# Altium PCB CAMtastic1_5.PcbDoc
Units mm, origin at the board's own origin, x right, y up, seen from the top; angles counter-clockwise.
Board outline 43 x 40.1 mm, 4 copper layers (Top Layer, Mid-Layer 1, Mid-Layer 2, Bottom Layer), stack 1.504 mm thick; 68 components, 89 nets, 359 pads, 109 vias.
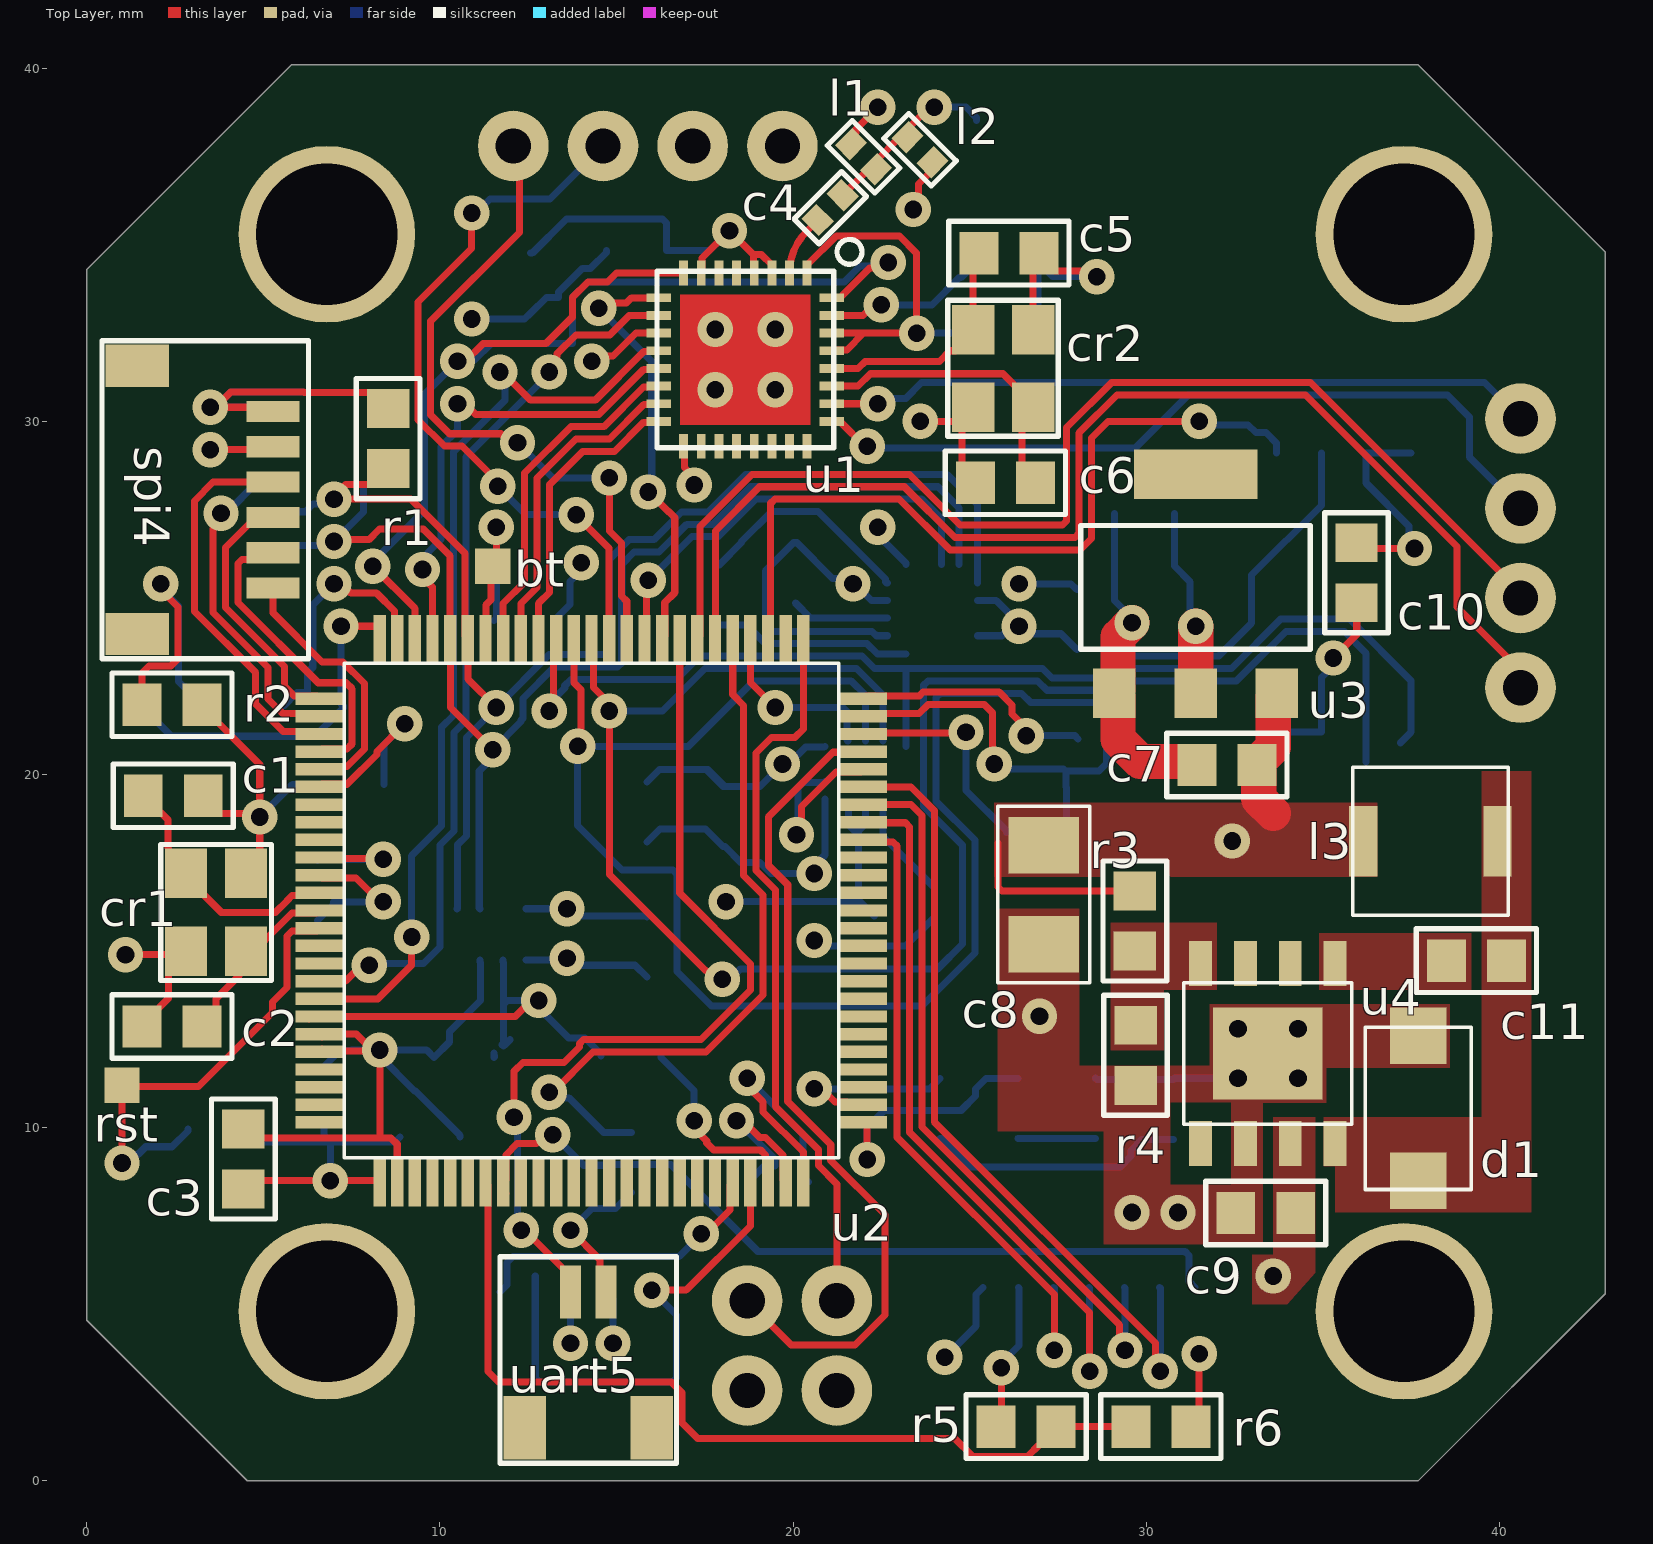
[diagram p0: Top Layer view]
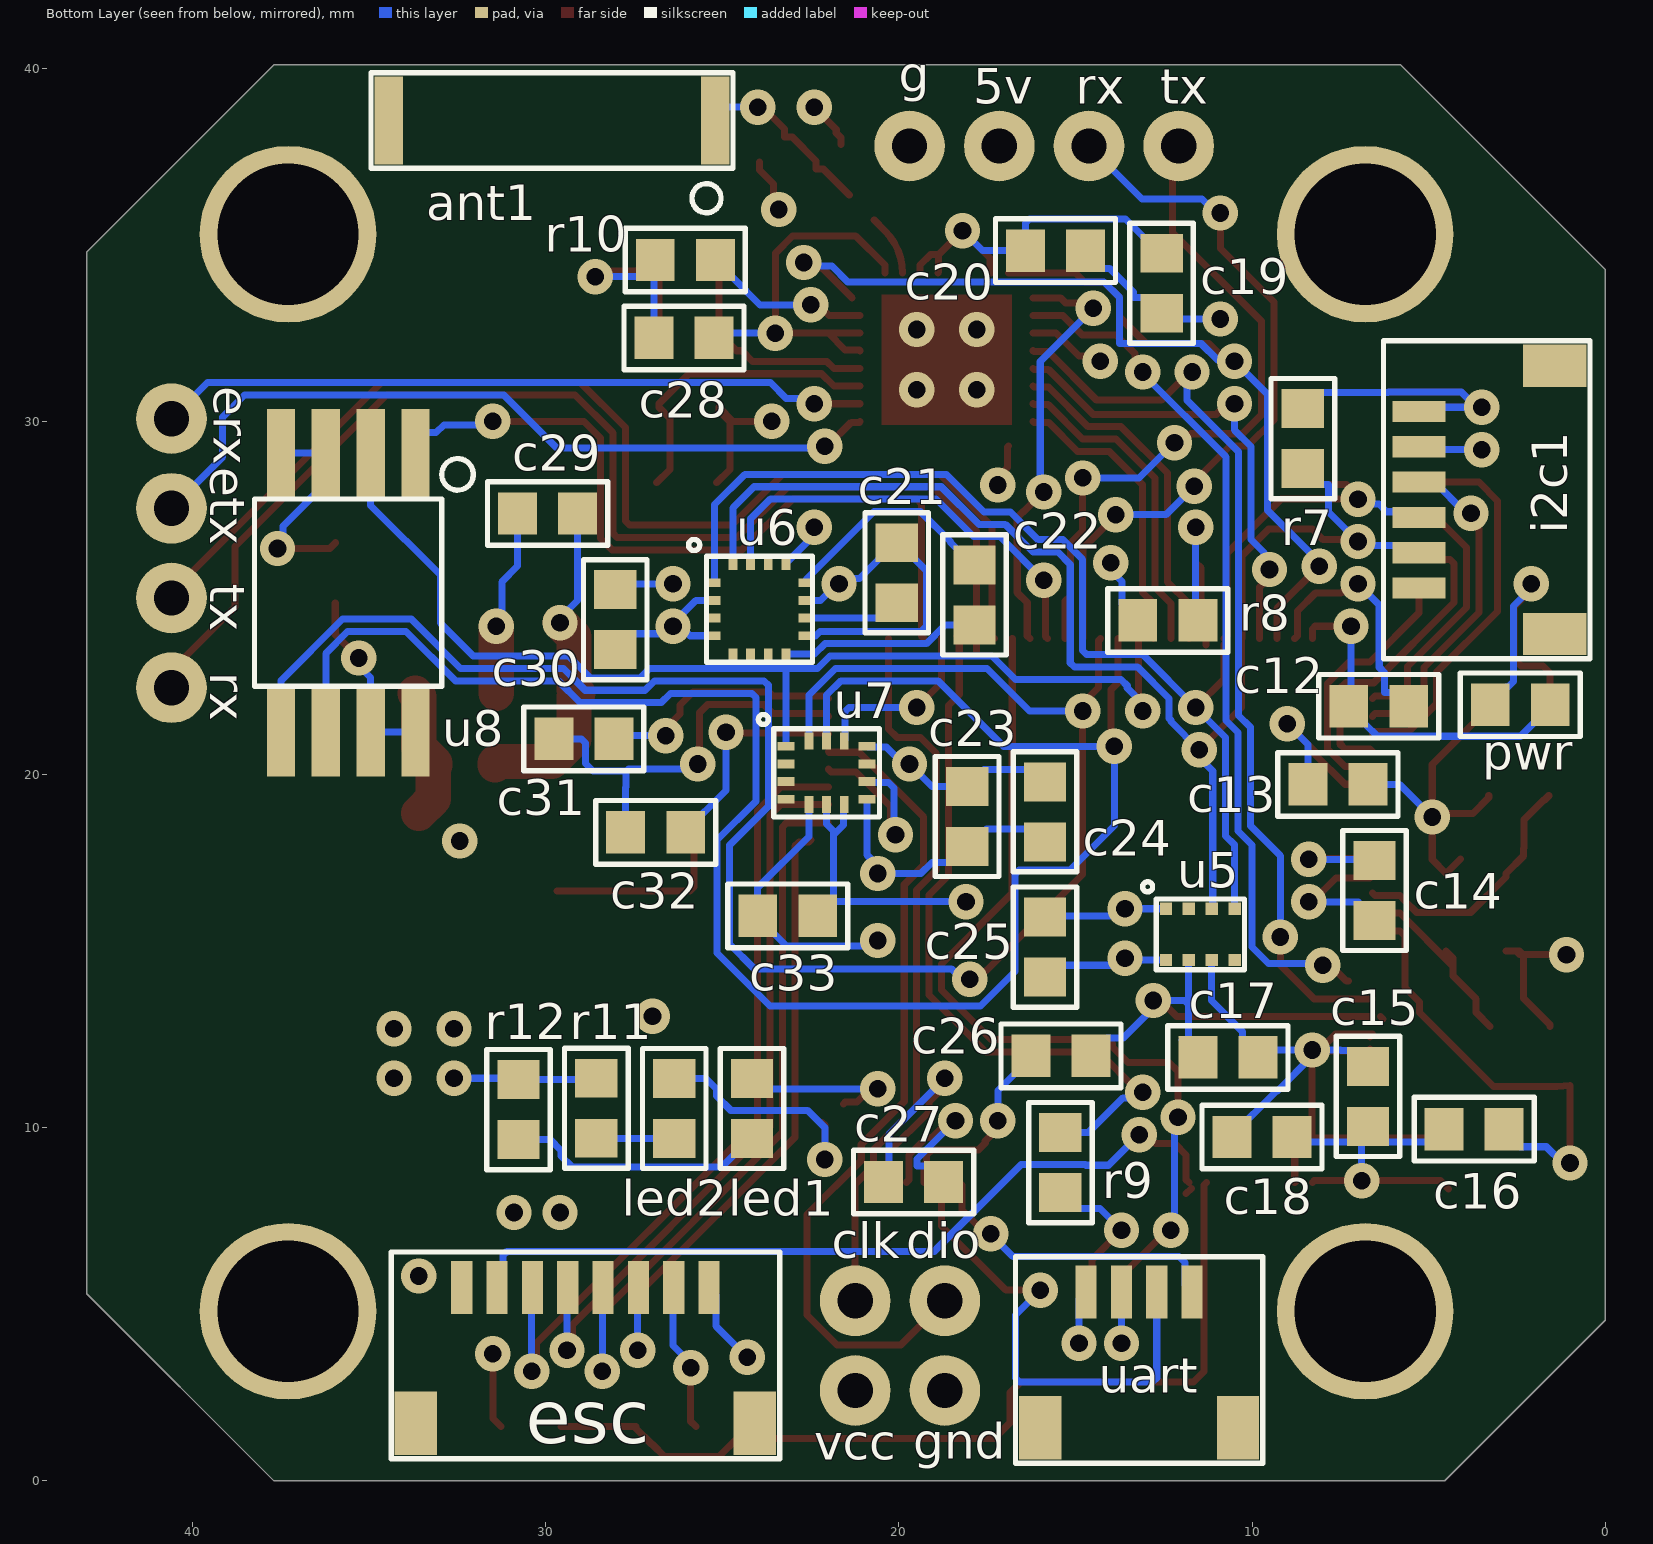
[diagram p1: Bottom Layer view, seen from below]
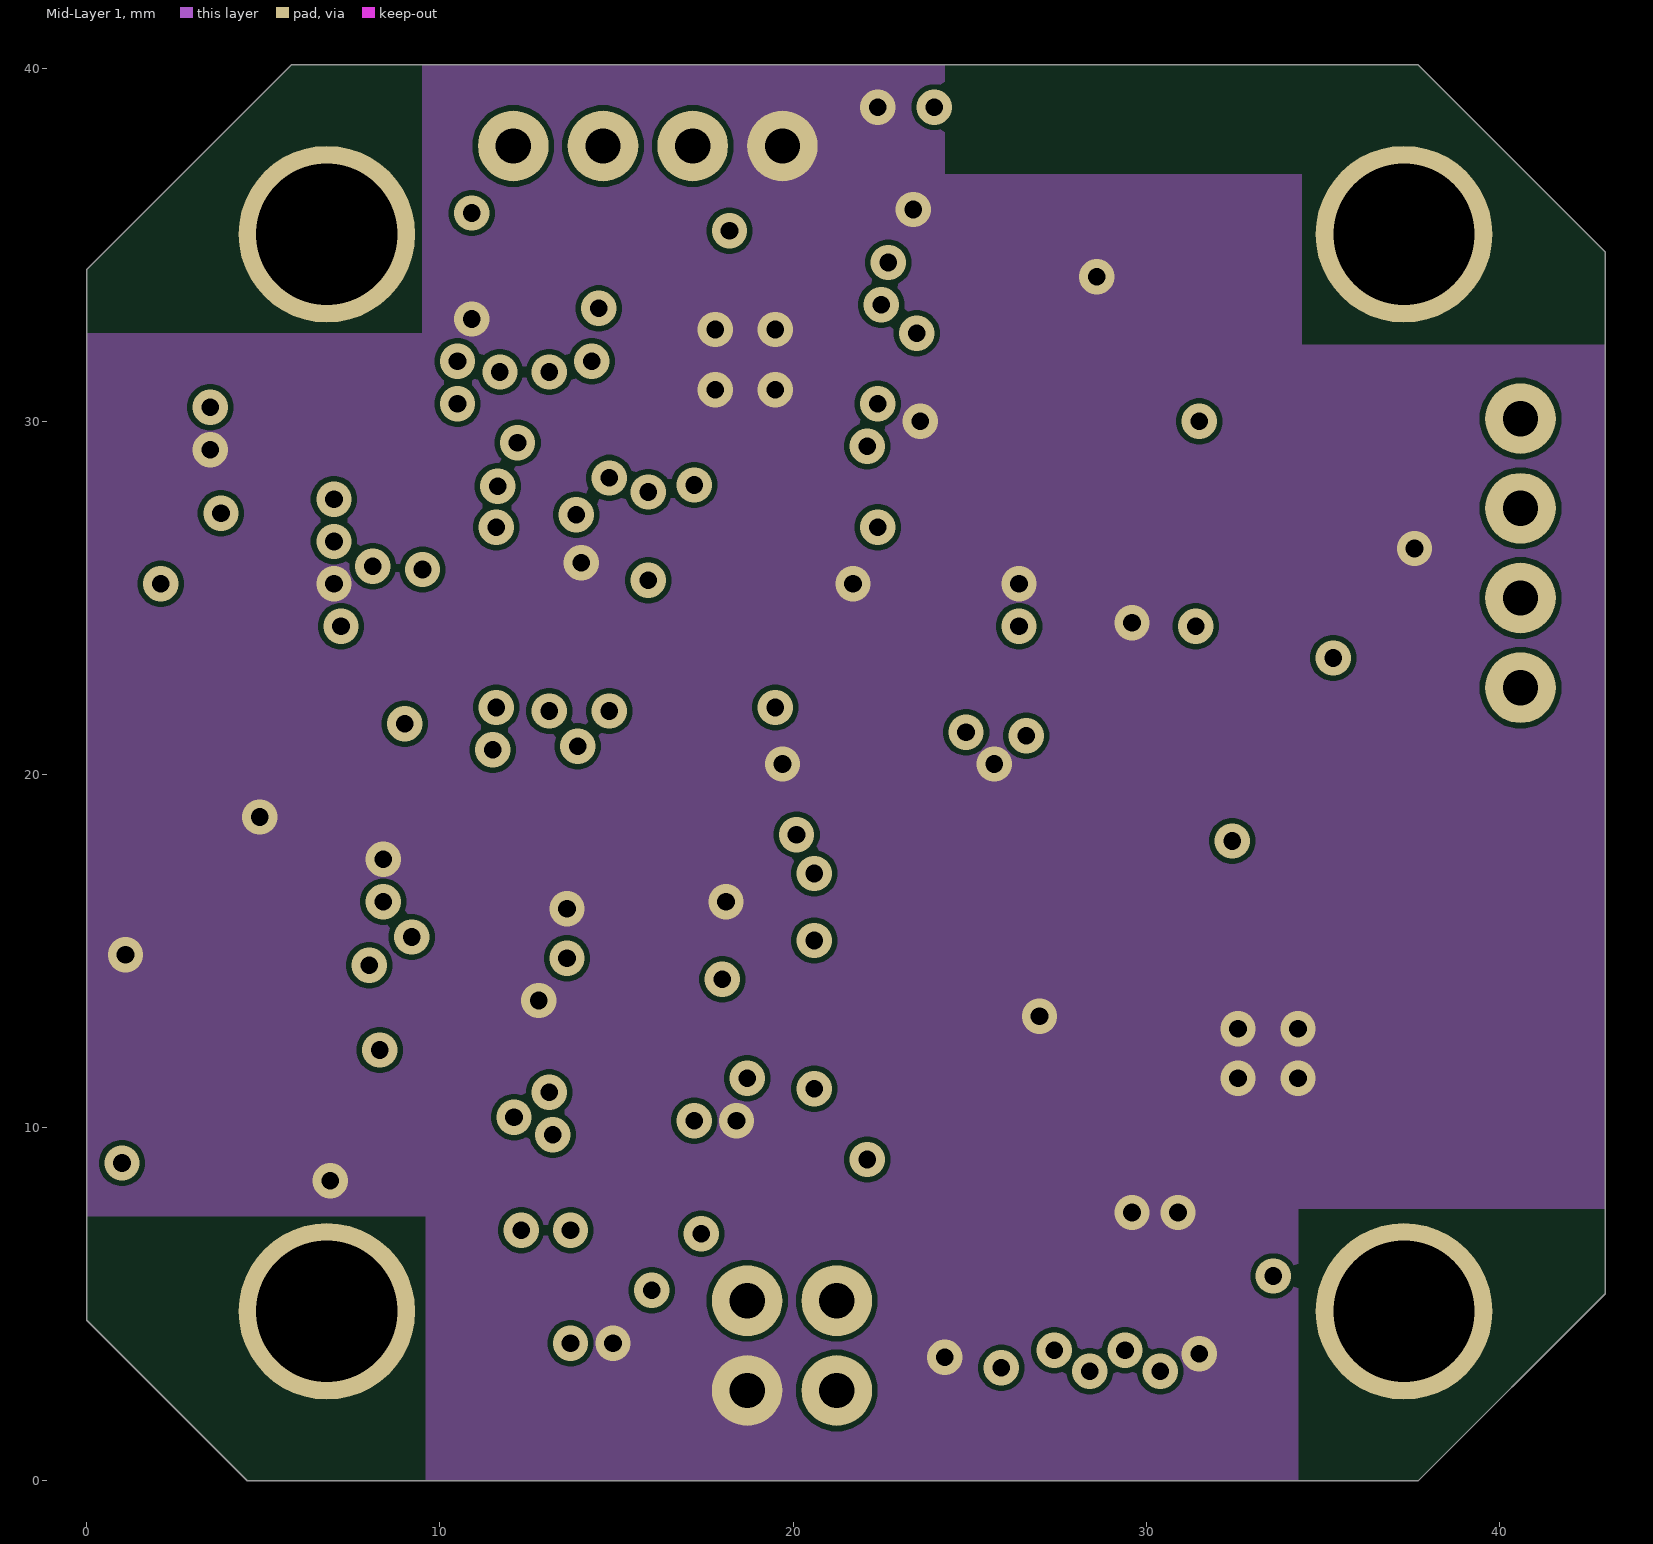
[diagram p2: Mid-Layer 1]
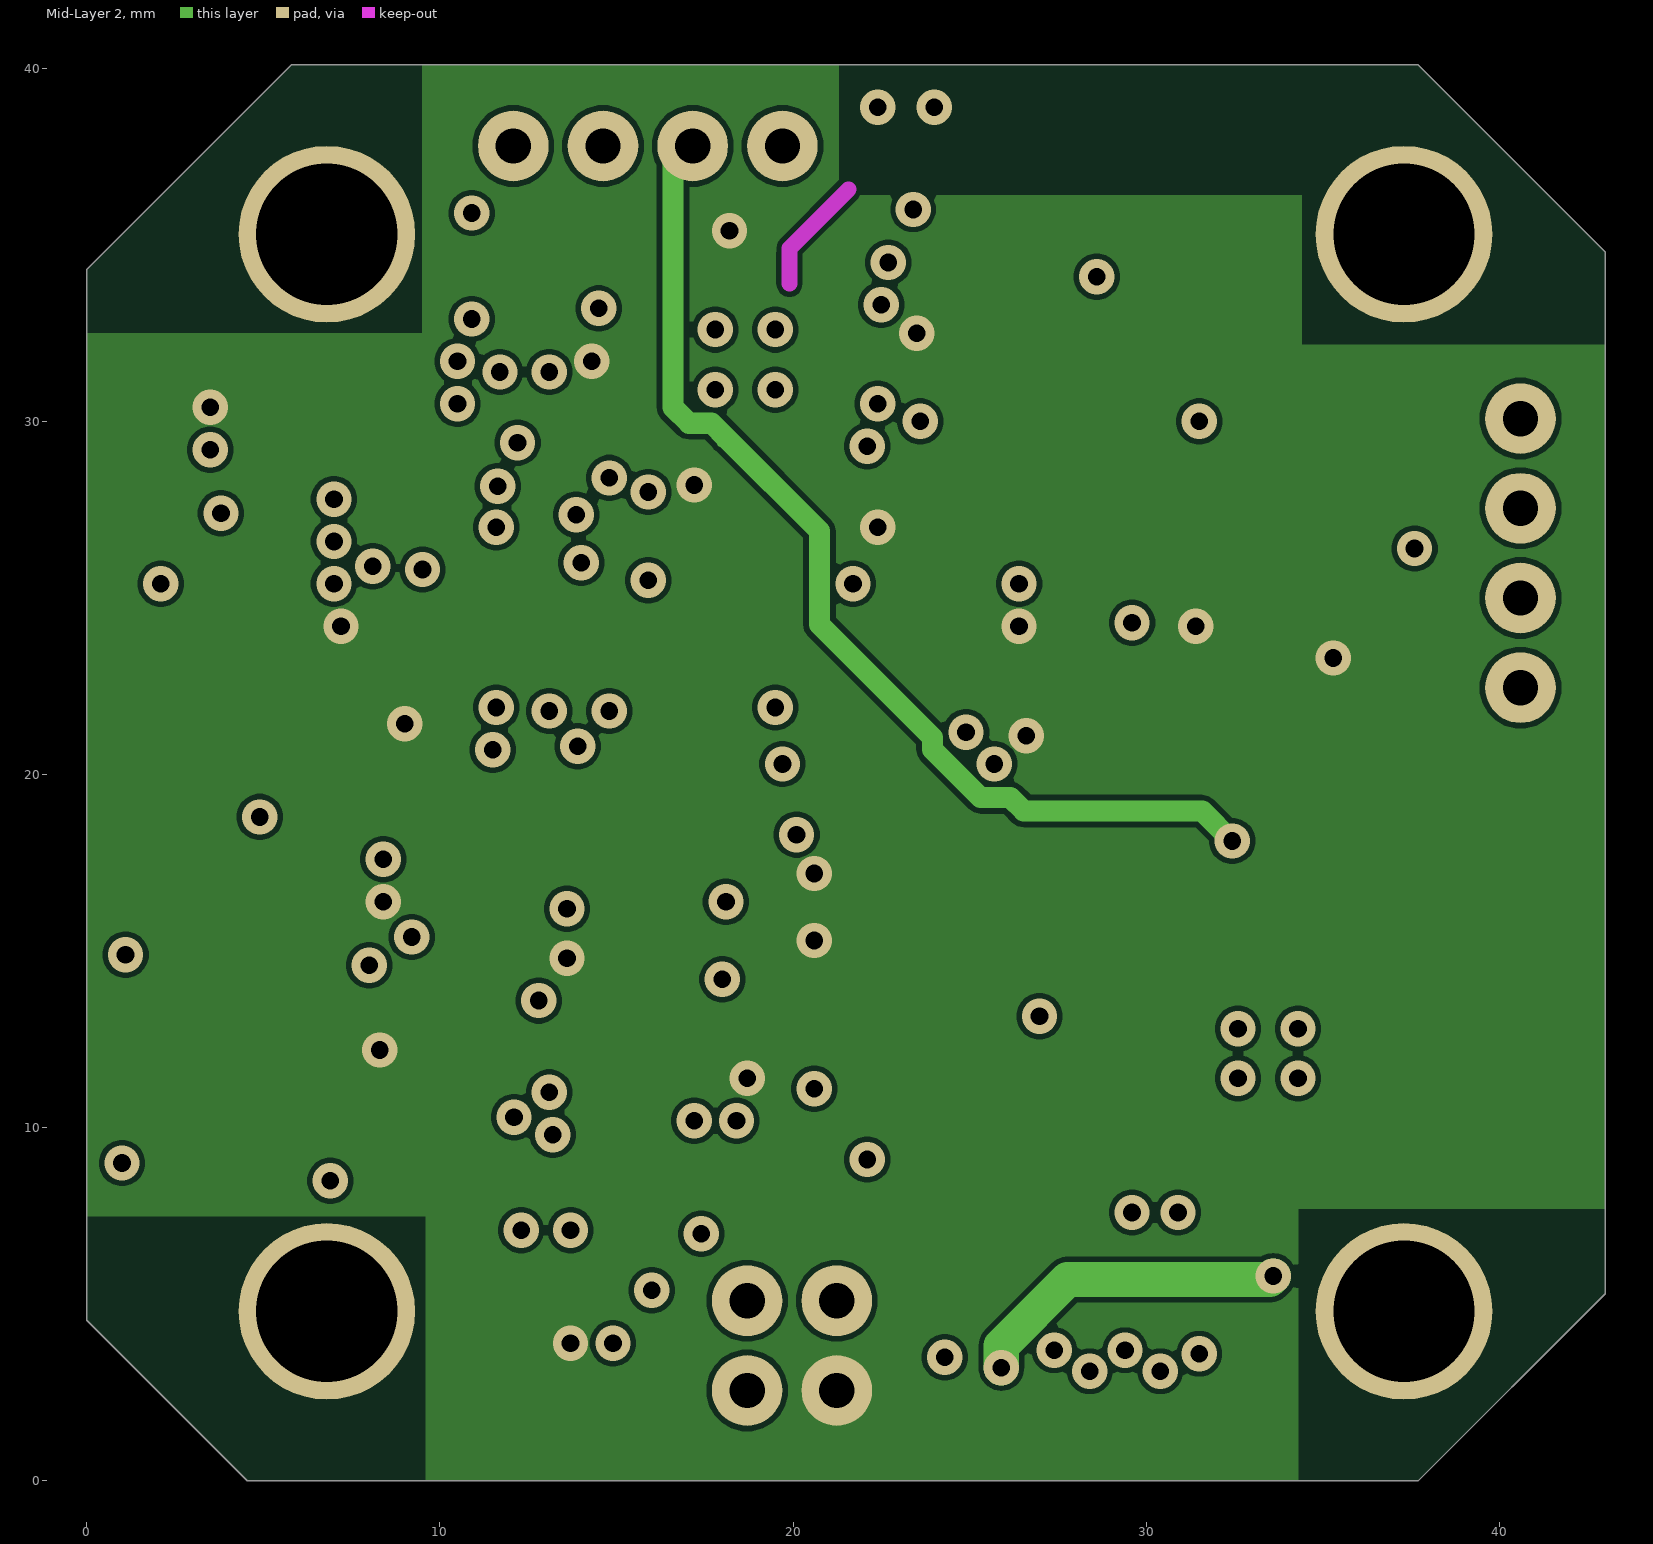
[diagram p3: Mid-Layer 2]

## Layer stack, top to bottom
Top Solder: solder mask 0.025, Solder Resist, Dk 3.5
Top Layer: signal copper 0.0175
Dielectric 1: prepreg 0.1168, FR-4, Dk 4.5
Mid-Layer 1: signal copper 0.0175
Dielectric 2: dielectric 1.2, FR-4, Dk 4.5
Mid-Layer 2: signal copper 0.0175
Dielectric 3: prepreg 0.1168, FR-4, Dk 4.5
Bottom Layer: signal copper 0.0175
Bottom Solder: solder mask 0.025, Solder Resist, Dk 3.5

## Board outline
0,4.546 4.531,0.015 4.531,0 37.699,0 43,5.301 43,34.8 37.7,40.1 5.8,40.1 0,34.3

## Design rules (kind name [scope] priority, off if disabled: settings)
Clearance Clearance_1 [All] p1: gap=0.15 ignorepadtopadclearanceinfootprint=FALSE except(0: Arc-Hole Track-Hole SMDPad-Hole THPad-Hole Via-Hole Fill-Hole Poly-Hole Region-Hole Text-Hole)
ComponentClearance ComponentClearance_1 [InComponent('c4')] p1: gap=0 collisioncheckmode=3 verticalgap=0 showdistances=FALSE
ComponentClearance [All] p2: gap=0.254 collisioncheckmode=3 verticalgap=0.254 showdistances=FALSE
HoleSize [All] p1: absolutevalues=TRUE maxlimit=5 minlimit=0.025 maxpercent=80.000 minpercent=20.000
MinimumSolderMaskSliver [All] p1: minsoldermaskwidth=0
PolygonConnect CAM_PolygonConnect_$Net0 [InNet('$Net0')] p1: connectstyle=Direct reliefconductorwidth=0.254 reliefentries=4 polygonreliefangle="90 Angle" airgapwidth=0.254
PolygonConnect CAM_PolygonConnect_$Net1 [InNet('$Net1')] p2: connectstyle=Direct reliefconductorwidth=0.254 reliefentries=4 polygonreliefangle="90 Angle" airgapwidth=0.254
PolygonConnect [All] p3: connectstyle=Direct reliefconductorwidth=0.254 reliefentries=4 polygonreliefangle="90 Angle" airgapwidth=0.254
RoutingVias [All] p1: holewidth=0.711 width=1.27 viastyle="Through Hole" minholewidth=0.5 minwidth=0.5 maxholewidth=3 maxwidth=4
SilkToSilkClearance [All] p1: silktosilkclearance=0
SilkToSolderMaskClearance [IsPad] p1: minsilkscreentomaskgap=0 clearancetoexposedcopper=TRUE
SolderMaskExpansion [All] p1: expansion=0.102 istentingtop=FALSE
Width [All] p1: maxlimit=5 minlimit=0.2 preferedwidth=0.254 minimp=50.000000 maximp=50.000000 favimp=50.000000
25 further rules are at their usual default settings.

## Components (designator, comment, footprint, x,y, rotation, side; value= is the part's Value field where it differs from the comment)
ant1 "Comment" "rainsun antenna" 29.9,38.8 r180 bottom
c1 "Comment" 0603 2.563,19.264 r270 top
c2 "Comment" 0603 2.3,13.001 r90 top
c3 "Comment" 0603 4.3,9 r180 top
c4 "Comment" 0402 21.059,36.049 r315 top
c5 "Comment" 0603 26,34.9 r90 top
c6 "Comment" 0603 25.9,28.4 r90 top
c7 "Comment" 0603 32.4,20.134 r270 top
c8 "Comment" 1206 26.33,16.86 r270 top
c9 "Comment" 0603 33.5,7.449 r270 top
c10 "Comment" 0603 35.819,25.6 r180 top
c11 "Comment" 0603 39.463,14.595 r270 top
c12 "Comment" 0603 6.3,21.8 r270 bottom
c13 "Comment" 0603 7.458,19.586 r270 bottom
c14 "Comment" 0603 6.4,16.831 r180 bottom
c15 "Comment" 0603 6.582,11 r180 bottom
c16 "Comment" 0603 3.6,9.825 r270 bottom
c17 "Comment" 0603 10.8,12.126 r90 bottom
c18 "Comment" 0603 9.609,9.6 r270 bottom
c19 "Comment" 0603 12.7,33.8 r0 bottom
c20 "Comment" 0603 15.455,34.7 r270 bottom
c21 "Comment" 0603 20.2,25.6 r0 bottom
c22 "Comment" 0603 17.725,25.2 r180 bottom
c23 "Comment" 0603 18.204,18.7 r0 bottom
c24 "Comment" 0603 16,18.831 r0 bottom
c25 "Comment" 0603 16,15 r0 bottom
c26 "Comment" 0603 15.3,11.9 r270 bottom
c27 "Comment" 0603 19.7,8.6 r90 bottom
c28 "Comment" 0603 26.2,32.5 r90 bottom
c29 "Comment" 0603 29.835,27.255 r270 bottom
c30 "Comment" 0603 27.9,24.5 r180 bottom
c31 "Comment" 0603 29.037,21.147 r90 bottom
c32 "Comment" 0603 27.002,18.5 r90 bottom
c33 "Comment" 0603 23.263,16.136 r90 bottom
cr1 "Comment" smd_crystall 3.5,16 r270 top
cr2 "Comment" smd_crystall 26.11,31.6 r90 top
d1 "Comment" SS34 38.8,10.65 r270 top
esc "Comment" SH1.0-8 31,3.2 r180 bottom
i2c1 "Comment" SH1.0-6 3,26.66 r90 bottom
l1 "Comment" 0402 22,37.5 r45 top
l2 "Comment" 0402 23.6,37.7 r45 top
l3 "Comment" inductor 38,18.01 r270 top
led1 "Comment" 0603 24.296,10.429 r0 bottom
led2 "Comment" 0603 26.5,10.429 r0 bottom
pwr "Comment" 0603 2.522,22.111 r90 bottom
r1 "Comment" 0603 8.4,29.4 r180 top
r2 "Comment" 0603 2.3,22.111 r90 top
r3 "Comment" 0603 29.815,15.968 r0 top
r4 "Comment" 0603 29.836,12.163 r0 top
r5 "Comment" 0603 26.486,1.671 r90 top
r6 "Comment" 0603 30.531,1.4 r270 top
r7 "Comment" 0603 8.7,29.4 r0 bottom
r8 "Comment" 0603 12.5,24.5 r90 bottom
r9 "Comment" 0603 15.292,9.125 r180 bottom
r10 "Comment" 0603 26.163,34.704 r90 bottom
r11 "Comment" 0603 28.704,10.437 r0 bottom
r12 "Comment" 0603 30.909,10.4 r0 bottom
spi4 "Comment" SH1.0-6 3,28.9 r270 top
u1 "Comment" esp8285 20,31.2 r0 top
u2 "Comment" lqfp100 5.292,7.6 r0 top
u3 "Comment" ams1117 29.715,24.706 r0 top
u4 "Comment" tps5430 35.82,14.1 r270 top
u5 "Comment" DPS368 11.1,15.5 r90 bottom
u6 "Comment" qmc5883l 24,24.6 r180 bottom
u7 "Comment" icm42688 22.05,20.05 r180 bottom
u8 "Comment" w25q 35.6,25.4 r180 bottom
uart "Comment" sh1.0-4 13.06,4.04 r180 bottom
uart5 "Comment" sh1.0-2 15.34,4.04 r0 top

## Footprints (in the part's own frame and the unit in brackets; to place one, negate y for a bottom-side part, rotate by r counter-clockwise, add the part's x,y. Pads: shape width x height; smd on the part's side, far side on the other; paste and mask are expansions set on the pad)
0402 [mm]
  rect 0.7x0.6 smd: 1(-0.007,0.5) 1(-0.007,-0.5)
  silkscreen extent -0.51,-0.95 0.49,0.95
0603 [mm] "0603"
  rect 1.2x1.1 smd: 1(-0.136,0.737) 1(-0.136,-0.963)
  silkscreen extent -1.04,-1.81 0.76,1.59
1206 [mm] "1206"
  rect 1.6x2 smd: 10(-1.14,0.77) 10(1.66,0.77)
  silkscreen extent -2.24,-0.53 2.76,2.07
ams1117 [mm] "ams1117"
  rect 1.2x1.4 smd: 1(-0.615,-2.406) 1(1.685,-2.406) 1(3.985,-2.406)
  rect 3.5x1.4 smd: 1(1.685,3.794)
  silkscreen extent -1.57,-1.16 4.94,2.34
DPS368 [mm] "DPS368"
  rect 0.35x0.35 smd: 1(-0.75,-0.61) 1(-0.75,0.04) 1(-0.75,0.69) 1(-0.75,1.34) 1(0.7,-0.61) 1(0.7,0.04) 1(0.7,0.69) 1(0.7,1.34)
  silkscreen extent -1.03,-0.89 1.46,2
esp8285 [mm] "esp8285"
  rect 0.7x0.25 smd: 4(-3.8,-1.2) 4(-3.8,-0.7) 4(-3.8,-0.2) 4(-3.8,0.3) 4(-3.8,0.8) 4(-3.8,1.3) 4(-3.8,1.8) 4(-3.8,2.3) 4(1.1,-1.2) 4(1.1,-0.7) 4(1.1,-0.2) 4(1.1,0.3) 4(1.1,0.8) 4(1.1,1.3) 4(1.1,1.8) 4(1.1,2.3)
  rect 0.25x0.7 smd: 4(-3.1,-1.9) 4(-3.1,3) 4(-2.6,-1.9) 4(-2.6,3) 4(-2.1,-1.9) 4(-2.1,3) 4(-1.6,-1.9) 4(-1.6,3) 4(-1.1,-1.9) 4(-1.1,3) 4(-0.6,-1.9) 4(-0.6,3) 4(-0.1,-1.9) 4(-0.1,3) 4(0.4,-1.9) 4(0.4,3)
  Top Layer region: -3.2,-1.3 0.5,-1.3 0.5,2.4 -3.2,2.4
  silkscreen extent -3.85,-1.95 1.15,3.05
icm42688 [mm] "icm42688"
  rect 0.48x0.25 smd: 1(-1.15,-0.75) 1(-1.15,-0.25) 1(-1.15,0.25) 1(-1.15,0.75) 1(1.15,-0.75) 1(1.15,-0.25) 1(1.15,0.25) 1(1.15,0.75)
  rect 0.25x0.48 smd: 1(-0.5,-0.9) 1(-0.5,0.9) 1(0,-0.9) 1(0,0.9) 1(0.5,-0.9) 1(0.5,0.9)
  silkscreen extent -1.93,-1.25 1.5,1.65
inductor [mm] "inductor"
  rect 2x0.8 smd: 7(-0.1,1.95) 7(-0.1,-1.85)
  silkscreen extent -2.2,-2.15 2,2.25
lqfp100 [mm] "lqfp64"
  rect 1.35x0.35 smd: 1(1.3,2.55) 1(1.3,3.05) 1(1.3,3.55) 1(1.3,4.05) 1(1.3,4.55) 1(1.3,5.05) 1(1.3,5.55) 1(1.3,6.05) 1(1.3,6.55) 1(1.3,7.05) 1(1.3,7.55) 1(1.3,8.05) 1(1.3,8.55) 1(1.3,9.05) 1(1.3,9.55) 1(1.3,10.05) 1(1.3,10.55) 1(1.3,11.05) 1(1.3,11.55) 1(1.3,12.05) 1(1.3,12.55) 1(1.3,13.05) 1(1.3,13.55) 1(1.3,14.05) 1(1.3,14.55) 1(16.7,2.55) 1(16.7,3.05) 1(16.7,3.55) 1(16.7,4.05) 1(16.7,4.55) 1(16.7,5.05) 1(16.7,5.55) 1(16.7,6.05) 1(16.7,6.55) 1(16.7,7.05) 1(16.7,7.55) 1(16.7,8.05) 1(16.7,8.55) 1(16.7,9.05) 1(16.7,9.55) 1(16.7,10.05) 1(16.7,10.55) 1(16.7,11.05) 1(16.7,11.55) 1(16.7,12.05) 1(16.7,12.55) 1(16.7,13.05) 1(16.7,13.55) 1(16.7,14.05) 1(16.7,14.55)
  rect 0.35x1.35 smd: 1(3,0.85) 1(3,16.25) 1(3.5,0.85) 1(3.5,16.25) 1(4,0.85) 1(4,16.25) 1(4.5,0.85) 1(4.5,16.25) 1(5,0.85) 1(5,16.25) 1(5.5,0.85) 1(5.5,16.25) 1(6,0.85) 1(6,16.25) 1(6.5,0.85) 1(6.5,16.25) 1(7,0.85) 1(7,16.25) 1(7.5,0.85) 1(7.5,16.25) 1(8,0.85) 1(8,16.25) 1(8.5,0.85) 1(8.5,16.25) 1(9,0.85) 1(9,16.25) 1(9.5,0.85) 1(9.5,16.25) 1(10,0.85) 1(10,16.25) 1(10.5,0.85) 1(10.5,16.25) 1(11,0.85) 1(11,16.25) 1(11.5,0.85) 1(11.5,16.25) 1(12,0.85) 1(12,16.25) 1(12.5,0.85) 1(12.5,16.25) 1(13,0.85) 1(13,16.25) 1(13.5,0.85) 1(13.5,16.25) 1(14,0.85) 1(14,16.25) 1(14.5,0.85) 1(14.5,16.25) 1(15,0.85) 1(15,16.25)
  silkscreen extent 2,1.55 16,15.55
qmc5883l [mm] "qmc5883l"
  rect 0.32x0.25 smd: 1(-1.22,-0.67) 1(-1.22,-0.17) 1(-1.22,0.33) 1(-1.22,0.83) 1(1.32,-0.67) 1(1.32,-0.17) 1(1.32,0.33) 1(1.32,0.83)
  rect 0.25x0.32 smd: 1(-0.7,-1.19) 1(-0.7,1.35) 1(-0.2,-1.19) 1(-0.2,1.35) 1(0.3,-1.19) 1(0.3,1.35) 1(0.8,-1.19) 1(0.8,1.35)
  silkscreen extent -1.96,-1.42 1.55,2.06
"rainsun antenna" [mm] "rainsun antenna"
  rect 0.8x2.5 smd: 6(-4.55,-0.28) 6(4.7,-0.28)
  silkscreen extent -5.05,-2.89 5.2,1.07
sh1.0-2 [mm] "sh1.0"
  rect 0.6x1.5 smd: 1(-1.64,1.31) 1(-0.64,1.31)
  rect 1.2x1.8 smd: 5(-2.94,-2.54) 5(0.66,-2.54)
  silkscreen extent -3.64,-3.54 1.36,2.31
sh1.0-4 [mm] "sh1.0"
  rect 0.6x1.5 smd: 1(-1.64,1.31) 1(-0.64,1.31) 1(0.36,1.31) 1(1.36,1.31)
  rect 1.2x1.8 smd: 5(-2.94,-2.54) 5(2.66,-2.54)
  silkscreen extent -3.64,-3.54 3.36,2.31
SH1.0-6 [mm]
  rect 0.6x1.5 smd: 1(-1.38,2.28) 1(-0.38,2.28) 1(0.62,2.28) 1(1.62,2.28) 1(2.62,2.28) 1(3.62,2.28)
  rect 1.2x1.8 smd: 5(-2.68,-1.57) 5(4.92,-1.57)
  silkscreen extent -3.38,-2.57 5.62,3.28
SH1.0-8 [mm]
  rect 0.6x1.5 smd: 1(-1.38,2.28) 1(-0.38,2.28) 1(0.62,2.28) 1(1.62,2.28) 1(2.62,2.28) 1(3.62,2.28) 1(4.62,2.28) 1(5.62,2.28)
  rect 1.2x1.8 smd: 5(-2.68,-1.57) 5(6.92,-1.57)
  silkscreen extent -3.38,-2.57 7.62,3.28
smd_crystall [mm]
  rect 1.4x1.2 smd: 3(-1.2,1.01) 3(-1.2,-0.69) 3(1,1.01) 3(1,-0.69)
  silkscreen extent -2.02,-1.4 1.83,1.73
SS34 [mm] "SS34"
  rect 1.6x1.6 smd: 8(-1.95,-1.1) 8(2.15,-1.1)
  silkscreen extent -2.2,-2.6 2.4,0.4
tps5430 [mm] "tps5430"
  rect 1.27x0.65 smd: 9(-0.55,-0.47) 9(-0.55,-1.74) 9(-0.55,-3.01) 9(-0.55,-4.28) 9(4.55,-1.74) 9(4.55,-0.47) 9(4.55,-4.28) 9(4.55,-3.01)
  rect 2.6x3.1 smd: 9(2,-2.375)
  silkscreen extent 0,-4.75 4,0
w25q [mm] "w25q"
  rect 0.8x2.5 smd: 1(-1.9,-4.2) 1(-1.9,3.7) 1(-0.63,-4.2) 1(-0.63,3.7) 1(0.64,-4.2) 1(0.64,3.7) 1(1.91,-4.2) 1(1.91,3.7)
  silkscreen extent -2.65,-2.9 3.55,3.55

## Free pads (board coordinates)
  rect 1x1 smd: 1(1,11.2) 1(11.5,25.9)
  round 5 hole 4: 1(6.8,4.8) 1(6.8,35.3) 1(37.3,4.8) 1(37.3,35.3)
  round 2 hole 1.001: 1(12.08,37.8) 1(14.62,37.8) 1(17.16,37.8) 1(18.7,2.56) 1(18.7,5.1) 1(19.7,37.8) 1(21.24,2.56) 1(21.24,5.1) 1(40.6,22.46) 1(40.6,25) 1(40.6,27.54) 1(40.6,30.08)

## Via types
v1: diameter 1, hole 0.5, Top Layer to Bottom Layer, tented both sides, 109 vias

## Nets (pads, with @x,y where several pads share a name; then routed paths per layer and width w, separated by ;. In a path a pad name is that pad's centre, name@x,y a point inside that pad or via, vN(x,y) a via of type N, cw(c..) or ccw(c..) an arc to the next point about the centre after c; other vN are vias at no path point)
ant: ant1.6@25.2,38.52 c4.1@21.407,36.407 l1.1@22.349,37.141 l2.1@23.241,38.049 | length 5
  Top Layer w0.2: c4.1@21.407,36.407 22.141,37.141 22.349,37.141 22.349,37.376 23.021,38.049 23.241,38.049 23.241,38.278 v1@23.663,38.7 ; v1@24,38.807 v1(24,38.9)
  Bottom Layer w0.2: v1(24,38.9) 24.9,38.9 25.2,38.6 ant1.6@25.2,38.52
antcap: c4.1@20.7,35.7 u1.4@19.9,34.2 | length 1.8
  Top Layer w0.2: u1.4@19.9,34.2 cw(c21.59,34.2) 20.395,35.395 c4.1@20.7,35.7
boot: pad.1@11.5,25.9 r8.1@11.537,24.364 u2.1@11.292,23.85 | length 6.1
  Top Layer w0.2: u2.1@11.3,23.675 11.3,24.8 11.442,24.942 11.442,25.842 11.6,26 v1(11.6,27)
  Bottom Layer w0.2: r8.1@11.537,24.364 11.6,24.428 v1(11.6,27)
ch1: esc.1@27.38,5.48 u2.1@21.992,18.15 | length 18.4
  Top Layer w0.2: u2.1@22.491,18.149 22.549,18.091 22.833,18.091 22.95,17.974 22.95,9.726 27.4,5.276 v1(27.4,3.7)
  Bottom Layer w0.2: esc.1@27.38,5.48 27.4,5.46 v1(27.4,3.7)
ch2: esc.1@28.38,5.48 u2.1@21.992,18.65 | length 21.3
  Top Layer w0.2: u2.1@22.006,18.636 23.183,18.636 23.3,18.519 23.3,9.871 28.4,4.771 v1(28.4,3.1)
  Bottom Layer w0.2: esc.1@28.38,5.48 28.4,5.46 v1(28.4,3.1)
ch3: esc.1@29.38,5.48 u2.1@21.992,19.15 | length 21.1
  Top Layer w0.2: u2.1@21.992,19.15 23.341,19.15 23.65,18.841 23.65,10.016 29.247,4.419 29.247,3.853 v1(29.4,3.7)
  Bottom Layer w0.2: esc.1@29.38,5.48 29.4,5.46 v1(29.4,3.7)
ch4: esc.1@30.38,5.48 u2.1@21.992,19.65 | length 23.2
  Top Layer w0.2: u2.1@21.992,19.65 23.336,19.65 24,18.986 24,10.161 30.261,3.9 30.261,3.239 v1(30.4,3.1)
  Bottom Layer w0.2: esc.1@30.38,5.48 30.4,5.46 v1(30.4,3.1)
ch5: 
ch6: 
clk: pad.1@21.24,5.1 u2.1@20.292,23.85 | length 20.9
  Top Layer w0.2: u2.1@20.292,23.85 20.292,21.292 20.05,21.05 19.389,21.05 18.95,20.611 18.95,20.25 18.95,17.285 19.5,16.735 19.5,10.595 20.717,9.377 20.717,8.927 21.24,8.404 pad.1@21.24,4.795
cs1: u2.1@18.792,23.85 u7.1@21.55,20.95 | length 5.2
  Top Layer w0.2: u2.1@18.792,23.85 18.792,22.608 v1(19.5,21.9)
  Bottom Layer w0.2: v1(19.5,21.9) 21.408,21.9 21.525,21.783 21.525,20.975 u7.1@21.55,20.95
cs2: u2.1@19.292,23.85 u8.1@33.69,29.1 | length 22.5
  Top Layer w0.2: u2.1@19.292,23.85 19.367,23.925 19.367,27.683 19.485,27.8 23.005,27.8 24.441,26.364 28.125,26.364 28.447,26.687 28.447,29.533 28.914,30 v1(31.5,30)
  Bottom Layer w0.2: v1(31.5,30) 31.597,29.903 32.887,29.903 33.107,29.683 33.39,29.683 33.69,29.383 u8.1@33.69,29.1
cs4: u1.4@16.2,31.5 u2.1@9.792,23.85 | length 13.5
  Top Layer w0.2: v1(9.509,25.805) 9.509,25.589 9.792,25.305 u2.1@9.792,23.85 ; v1(10.5,30.5) 10.716,30.5 11.016,30.2 14.5,30.2 15.775,31.475 16.175,31.475 u1.4@16.2,31.5
  Bottom Layer w0.2: v1(9.509,25.805) 9.662,25.958 9.662,26.284 10.037,26.659 10.037,29.287 10.5,29.751 v1(10.5,30.5)
current: esc.1@31.38,5.48 u2.1@11.792,8.45 | length 23
  Top Layer w0.2: u2.1@11.717,8.283 u2.1@11.867,8.133 ; u2.1@11.792,8.45 11.867,8.525 11.867,9.229 12.189,9.55 12.734,9.55 12.984,9.8 v1(13.2,9.8)
  Bottom Layer w0.2: v1(13.2,9.8) 13.253,9.747 14.063,8.937 14.699,8.937 14.724,8.962 16.538,8.962 19,6.5 21.4,6.5 31.091,6.5 31.209,6.383 31.209,5.651 esc.1@31.38,5.48
dcdc_boot: c11.1@38.5,14.731 u4.9@35.35,14.65
dio: pad.1@18.7,5.1 u2.1@21.992,20.65 | length 23.7
  Top Layer w0.2: pad.1@18.7,5.1 19.95,3.85 21.758,3.85 22.6,4.692 22.6,7.539 21.067,9.072 21.067,9.522 19.85,10.74 19.85,16.88 19.3,17.43 19.3,18.795 21.137,20.632 21.974,20.632 u2.1@21.992,20.65
drdy: u2.1@15.792,23.85 u6.1@24.2,25.95 | length 12.5
  Top Layer w0.2: u2.1@15.792,23.85 15.846,23.904 15.846,25.446 v1(15.9,25.5)
  Bottom Layer w0.2: v1(15.9,25.5) 17.137,26.737 17.891,26.737 18.954,27.8 23.643,27.8 24.2,27.243 u6.1@24.2,25.95
esp_rx: pad.1@40.6,30.08 u1.4@21.1,30.5 | length 20.2
  Top Layer w0.2: u1.4@21.1,30.5 v1(22.4,30.5)
  Bottom Layer w0.2: v1(22.4,30.5) 22.553,30.653 23.192,30.653 23.639,31.1 39.58,31.1 pad.1@40.6,30.08
esp_tx: pad.1@40.6,27.54 u1.4@21.1,30 | length 22.9
  Top Layer w0.2: u1.4@21.1,30 21.125,29.975 21.35,29.975 22.025,29.3 v1(22.1,29.3)
  Bottom Layer w0.2: v1(22.1,29.3) 22.15,29.25 29.689,29.25 31.189,30.75 38.528,30.75 39.15,30.128 39.15,28.99 pad.1@40.6,27.54 ; pad.1@40.067,27.873 pad.1@40.4,27.54
espboot: u1.4@16.2,30.5 u2.1@12.292,23.85 | length 9.1
  Top Layer w0.2: u2.1@12.292,23.85 12.292,24.844 12.75,25.301 12.75,28.394 13.856,29.5 14.8,29.5 15.775,30.475 16.175,30.475 u1.4@16.2,30.5
ext_rstb: u1.4@16.9,34.2 u1.4@21.1,33.5 u2.1@9.292,23.85 | length 33
  Top Layer w0.2: v1(8.1,25.9) 9.292,24.708 u2.1@9.292,23.85 ; v1(10.5,31.7) 10.716,31.7 11.216,32.2 13,32.2 13.75,32.95 13.75,33.511 14.189,33.95 14.75,33.95 15,34.2 u1.4@16.9,34.2 ; u1.4@21.325,33.5 21.35,33.525 22.172,34.347 22.547,34.347 v1(22.7,34.5)
  Bottom Layer w0.2: v1(8.1,25.9) 8.1,26.015 9.559,27.474 9.559,30.759 10.546,31.746 10.985,31.746 11.439,32.2 13.739,32.2 13.75,32.211 13.75,33.511 14.189,33.95 14.75,33.95 21.45,33.95 21.9,34.4 22.6,34.4 v1(22.7,34.5)
exti1: u1.4@16.2,30 u2.1@12.792,23.85 | length 8.3
  Top Layer w0.2: u2.1@12.792,23.85 12.792,24.849 13.1,25.157 13.1,28.206 14.044,29.15 14.945,29.15 15.77,29.975 16.175,29.975 u1.4@16.2,30
fsync: u2.1@21.992,20.15 u7.1@20.9,19.8 | length 5.2
  Top Layer w0.2: v1(20.1,18.3) 20.239,18.439 20.239,19.1 21.214,20.075 21.917,20.075 u2.1@21.992,20.15
  Bottom Layer w0.2: v1(20.1,18.3) 20.136,18.336 20.136,19.619 20.291,19.775 20.875,19.775 u7.1@20.9,19.8
gnd: c1.1@3.3,19.4 c2.1@1.563,12.866 c3.1@4.436,8.263 c5.1@26.963,34.764 c6.1@25.163,28.264 c7.1@31.437,20.269 c8.10@27.1,15.2 c9.1@32.537,7.584 c10.1@35.954,26.563 c12.1@5.563,21.936 c13.1@6.722,19.721 c14.1@6.536,17.567 c15.1@6.718,10.037 c16.1@4.563,9.96 c17.1@11.537,11.991 c18.1@8.872,9.736 c19.1@12.564,33.063 c20.1@14.719,34.836 c21.1@20.064,26.563 c23.1@18.069,19.663 c24.1@15.864,19.794 c25.1@15.864,15.963 c26.1@14.563,12.036 c27.1@18.737,8.464 c28.1@26.937,32.364 c29.1@29.099,27.391 c30.1@28.036,25.237 c31.1@29.773,21.012 c32.1@27.739,18.364 c33.1@22.3,16 cr1.3@2.81,15 cr1.3@4.51,17.2 cr2.3@25.1,30.4 cr2.3@26.8,32.6 d1.8@37.7,12.6 esc.1@25.38,5.48 i2c1.1@5.28,29.28 l1.1@21.641,37.849 l2.1@23.949,37.341 pad.1@18.7,2.56 pad.1@19.7,37.8 r2.1@3.263,21.976 r4.1@29.7,11.2 r6.1@31.268,1.536 r8.1@13.237,24.364 r10.1@26.9,34.569 r11.1@28.569,11.4 r12.1@30.773,11.363 spi4.1@5.28,29.28 u2.1@6.592,13.15 u2.1@6.592,17.65 u2.1@8.292,8.45 u2.1@8.792,23.85 u2.1@19.792,8.45 u2.1@21.992,21.65 u3.1@29.1,22.3 u4.9@32.81,9.55 u4.9@33.445,12.1 u5.1@11.79,14.75 u5.1@12.44,16.2 u6.1@22.68,23.93 u6.1@22.68,24.93 u7.1@20.9,20.8 u7.1@21.55,19.15 u7.1@22.05,19.15 u8.1@36.23,29.1 u8.1@37.5,29.1 uart.1@14.7,5.35 | length 147.4
  Top Layer w0.2: v1(1.1,14.9) cr1.3@2.327,14.9 ; c2.1@1.563,12.866 1.563,12.916 2.31,13.662 2.31,14.883 cr1.3@2.327,14.9 ; cr1.3@2.81,15 cr1.3@2.527,15 ; r2.1@3.263,21.976 3.263,21.926 4.9,20.289 v1(4.9,18.8) ; c1.1@3.3,19.4 3.3,19.35 3.75,18.9 4.8,18.9 v1(4.9,18.8) ; v1(3.5,29.2) 5.2,29.2 spi4.1@5.28,29.28 ; cr1.3@4.1,17.61 4.51,17.2 4.9,17.59 v1(4.9,18.8) ; c3.1@4.436,8.263 4.672,8.5 v1(6.9,8.5) 8.242,8.5 u2.1@8.292,8.45 ; u2.1@6.291,13.075 u2.1@6.366,13.15 ; u2.1@6.592,13.15 12.134,13.15 12.584,13.6 v1(12.8,13.6) ; u2.1@6.592,17.65 6.617,17.625 8.375,17.625 v1(8.4,17.6) ; v1(7,25.4) 7.216,25.4 7.482,25.135 8.211,25.135 8.717,24.629 8.717,23.925 u2.1@8.792,23.85 ; v1(18.4,10.2) 18.581,10.2 19.056,9.725 19.221,9.725 19.717,9.229 19.717,8.525 u2.1@19.792,8.45 ; pad.1@19.7,37.8 pad.1@20.037,37.8 ; l1.1@21.641,37.849 21.641,38.031 21.777,38.167 21.777,38.268 22.4,38.891 v1(22.4,38.9) ; u2.1@21.992,21.65 22.067,21.725 22.685,21.725 23.57,21.725 23.829,21.984 25.416,21.984 25.65,21.75 25.65,20.35 v1(25.7,20.3) ; v1(23.4,36) 23.553,36.153 23.553,36.721 23.949,37.116 l2.1@23.949,37.341 ; v1(23.6,30) 24.7,30 25.1,30.4 25.1,30.3 24.787,29.987 24.787,28.641 c6.1@25.163,28.264 ; cr2.3@26.8,32.6 26.8,34.601 c5.1@26.963,34.764 ; c5.1@27,34.687 27,34.678 27.413,34.264 28.219,34.264 28.384,34.1 v1(28.6,34.1) ; r6.1@31.268,1.536 31.5,1.768 v1(31.5,3.6) ; c10.1@35.954,26.563 36.118,26.4 v1(37.6,26.4) ; cr1.3@2.327,14.9 2.427,15 cr1.3@2.527,15 ; cr1.3@2.327,14.9 2.427,14.9 cr1.3@2.527,15
  Top Layer w1: v1(29.6,24.3) 29.2,23.9 29.2,22.4 29.1,22.3 29.2,22.2 29.2,21 29.831,20.369 31.387,20.369 31.437,20.319 c7.1@31.437,20.269
  Bottom Layer w0.2: v1(3.5,29.2) 5.2,29.2 i2c1.1@5.28,29.28 ; c16.1@4.563,9.96 4.924,9.6 c15.1@6.9,9.6 ; v1(4.9,18.8) 5.821,19.721 c13.1@6.722,19.721 ; c12.1@5.563,21.936 5.954,22.326 6.25,22.326 6.25,22.889 6.4,23.039 6.4,24.8 v1(7,25.4) ; c14.1@6.536,17.567 6.568,17.6 v1(8.4,17.6) ; c15.1@6.718,10.037 6.718,9.782 c15.1@6.9,9.6 ; v1(6.9,8.5) c15.1@6.9,9.6 ; c18.1@8.872,9.736 8.736,9.6 c15.1@6.9,9.6 ; v1(10.9,32.9) 12.401,32.9 12.564,33.063 13.014,33.513 13.364,33.513 13.364,33.659 14.041,34.336 14.269,34.336 14.719,34.786 c20.1@14.719,34.836 ; c17.1@11.537,12.12 11.537,11.991 11.546,12 c17.1@11.546,12.05 ; c17.1@11.765,12.349 11.845,12.349 c17.1@11.987,12.491 ; u5.1@11.79,14.75 11.79,14.69 11.805,14.675 11.805,13.492 ; c17.1@11.805,12.309 11.805,13.492 ; u5.1@12.44,16.2 v1(13.6,16.2) 13.816,16.2 14.027,15.99 15.838,15.99 c25.1@15.864,15.963 ; v1@12.647,13.23 12.721,13.304 v1@12.8,13.304 ; r8.1@13.237,24.364 13.687,24.814 13.687,25.47 14,25.784 v1(14,26) ; c26.1@14.563,12.036 14.563,12.086 14.113,12.536 13.648,12.536 13.057,13.126 12.879,13.304 v1@12.8,13.304 ; uart.1@14.7,5.35 14.9,5.15 v1(14.9,3.9) ; c24.1@15.864,19.794 16.218,20.148 c23.1@17.535,20.148 ; v1(18.1,16.4) 21.887,16.4 c33.1@21.894,16.406 ; c23.1@18.114,19.663 19.063,19.663 v1(19.7,20.3) 19.881,20.3 20.356,20.775 20.875,20.775 u7.1@20.9,20.8 ; v1(18.4,10.2) 19.486,9.114 19.486,8.913 19.484,8.911 19.184,8.911 c27.1@18.737,8.464 ; u7.1@21.55,19.15 21.575,19.125 21.575,18.574 21.8,18.349 21.85,18.399 ; u7.1@22.05,19.15 22.05,18.599 21.85,18.399 ; c33.1@22.3,16 c33.1@21.894,16.406 ; u6.1@22.68,23.93 22.365,23.93 22.24,24.055 19.369,24.055 19.214,24.21 19.214,25.763 20.014,26.563 20.064,26.563 20.114,26.563 21.122,25.555 21.545,25.555 v1(21.698,25.402) 21.748,25.402 22.22,24.93 u6.1@22.68,24.93 ; v1(24.3,3.5) 25.18,4.38 25.18,5.28 esc.1@25.38,5.48 ; v1(25.7,20.3) 25.838,20.162 27.663,20.162 27.725,20.1 ; v1(26.4,25.4) 27.872,25.4 c30.1@28.036,25.237 ; c28.1@26.937,32.364 r10.1@26.937,34.513 ; c32.1@27.739,18.364 27.739,19.632 27.725,19.647 27.725,20.1 ; r11.1@28.569,11.4 28.605,11.363 30.773,11.363 30.81,11.4 v1(32.6,11.4) v1@32.7,11.5 ; v1(28.6,34.1) 27.35,34.1 r10.1@26.937,34.513 ; c29.1@29.099,27.391 29.099,24.93 29.6,24.428 v1(29.6,24.3) ; c31.1@29.773,21.012 28.99,21.012 28.873,20.895 28.873,20.308 28.665,20.1 27.725,20.1 ; u8.1@37.5,29.1 36.23,29.1 36.23,28.25 37.447,27.033 37.447,26.553 v1(37.6,26.4) ; 11.805,13.492 11.913,13.6 v1(12.8,13.6) v1@12.8,13.304 ; c23.1@17.535,20.148 17.585,20.148 18.069,19.663 18.019,19.663 c23.1@17.535,20.148 ; 21.85,18.399 21.85,16.45 c33.1@21.894,16.406 ; r10.1@26.937,34.513 26.9,34.55 26.9,34.569 26.937,34.532 r10.1@26.937,34.513
  other v1: 29.6,7.6 30.9,7.6 34.3,11.4 32.6,12.8 34.3,12.8 26.979,13.156 17.8,30.9 19.5,30.9 17.8,32.6 19.5,32.6
led1: led2.1@26.364,11.393 u2.1@21.992,10.15 | length 7
  Top Layer w0.2: v1(22.1,9.1) 22.1,10.075 22.175,10.15 u2.1@22.212,10.15
  Bottom Layer w0.2: v1(22.1,9.1) 22.1,10.005 22.588,10.493 24.764,10.493 25.164,10.893 25.164,11.092 25.464,11.393 led2.1@26.364,11.393
led1r: led2.1@26.364,9.693 r11.1@28.569,9.7 | length 2.2
  Bottom Layer w0.2: led2.1@26.364,9.693 26.372,9.7 r11.1@28.569,9.7
led2: led1.1@24.16,11.393 u2.1@21.992,10.65 | length 4.8
  Top Layer w0.2: v1(20.6,11.1) 20.816,11.1 21.191,10.725 21.523,10.725 u2.1@21.573,10.675
  Bottom Layer w0.2: v1(20.6,11.1) 23.868,11.1 led1.1@24.16,11.393
led2r: led1.1@24.16,9.693 r12.1@30.773,9.663 | length 7.4
  Bottom Layer w0.2: led1.1@24.16,9.693 24.21,9.693 25.01,8.893 29.265,8.893 29.569,9.197 29.569,9.359 29.873,9.663 r12.1@30.773,9.663
led4: 
led4r: 
led5: 
led5r: 
loop: c11.1@40.2,14.731 d1.8@37.7,8.5 l3.7@39.95,18.11 u4.9@35.35,9.55
miso: u2.1@13.292,23.85 u7.1@23.2,20.8 u8.1@34.96,29.1 | length 31.6
  Top Layer w0.2: v1(13.1,21.8) 13.217,21.917 13.217,23.849 u2.1@13.3,23.931
  Bottom Layer w0.2: v1(13.1,21.8) 13.1,22.016 13.536,22.452 13.536,22.514 13.717,22.696 16.702,22.696 17.361,23.355 20.859,23.355 21.95,23.355 22.305,23 23.2,23 ; u7.1@23.2,20.8 23.2,23 ; u8.1@34.96,29.1 34.96,27.621 32.986,25.647 32.986,24.286 32.055,23.355 29.358,23.355 28.739,22.737 27.332,22.737 27.069,23 23.2,23
miso2: u1.4@16.2,33 u2.1@6.592,14.15 | length 24.6
  Top Layer w0.2: 7.267,14.15 7.334,14.15 7.784,14.6 v1(8,14.6) ; v1(13.1,31.4) 13.1,31.616 13.316,31.832 13.316,31.916 13.85,32.45 14.811,32.45 15.361,33 u1.4@16.2,33
  Bottom Layer w0.2: v1(8,14.6) 8.05,14.65 9.533,14.65 10,15.117 10,18.005 10.4,18.405 10.4,21.195 10.737,21.532 10.737,28.997 13.1,31.361 v1(13.1,31.4)
miso4: spi4.1@5.28,26.28 u2.1@6.592,20.65 | length 9
  Top Layer w0.2: spi4.1@5.28,26.28 5.089,26.089 4.397,26.089 4.28,25.971 4.28,24.876 6.556,22.6 7.346,22.6 7.517,22.429 7.517,20.871 7.371,20.725 6.667,20.725 u2.1@6.592,20.65
mosi: u2.1@14.292,23.85 u7.1@22.55,20.95 u8.1@37.5,21.2 | length 53.6
  Top Layer w0.2: u2.1@14.295,23.847 14.35,23.792 14.35,22.466 14.8,22.016 14.8,17.173 17.521,14.452 17.531,14.452 17.784,14.2 v1(18,14.2)
  Bottom Layer w0.2: v1(14.8,21.8) 16.301,21.8 17.506,23.005 21.795,23.005 22.55,22.25 u7.1@22.55,20.95 ; v1(18,14.2) 18.216,14.2 18.516,14.5 24.1,14.5 24.8,15.2 24.8,18 23.7,19.1 23.7,22.533 23.817,22.65 26.924,22.65 27.187,22.387 28.884,22.387 29.502,23.005 32.414,23.005 33.809,24.4 35.756,24.4 37.5,22.656 37.5,21.2 u8.1@37.2,20.9
mosi2: u1.4@16.2,32 u2.1@6.592,13.65 | length 26.4
  Top Layer w0.2: u2.1@6.592,13.65 8.25,13.65 9.2,14.6 v1(9.2,15.4) ; v1(11.7,31.4) 11.766,31.4 12.566,30.6 14.4,30.6 15.775,31.975 16.175,31.975 u1.4@16.2,32
  Bottom Layer w0.2: v1(9.2,15.4) 9.2,17.7 10.05,18.55 10.05,21.34 10.387,21.677 10.387,29.142 11.843,30.599 11.843,31.257 v1(11.7,31.4)
mosi4: spi4.1@5.28,25.28 u2.1@6.592,20.15 | length 7.5
  Top Layer w0.2: spi4.1@5.28,25.28 5.28,24.577 6.667,23.19 7.251,23.19 7.867,22.574 7.867,20.721 7.371,20.225 6.667,20.225 u2.1@6.592,20.15
nrst: c16.1@2.863,9.96 pad.1@1,11.2 u2.1@6.592,15.65 | length 13
  Top Layer w0.2: v1(1,9) 1,11.2 1.364,11.164 3.164,11.164 5.263,13.263 5.263,13.563 5.667,13.967 5.667,15.429 5.814,15.575 6.517,15.575 u2.1@6.592,15.65
  Bottom Layer w0.2: v1(1,9) 1.211,9 1.671,9.46 2.413,9.46 2.863,9.91 c16.1@2.863,9.96
osc_in: c1.1@1.6,19.4 cr1.3@2.81,17.2 u2.1@6.592,16.65 | length 7.2
  Top Layer w0.2: c1.1@1.6,19.4 1.714,19.286 1.737,19.286 2.3,18.722 2.3,17.917 2.31,17.907 2.31,17.7 2.81,17.2 2.81,17.1 3.81,16.1 5.344,16.1 5.667,16.424 5.667,16.429 5.814,16.575 5.9,16.575 6.517,16.575 u2.1@6.592,16.65
osc_out: c2.1@3.263,12.866 cr1.3@4.51,15 u2.1@6.592,16.15 | length 5.9
  Top Layer w0.2: c2.1@3.263,12.866 3.655,13.257 3.655,13.648 cr1.3@4.31,14.303 ; cr1.3@4.51,15 4.31,14.8 cr1.3@4.31,14.303 ; u2.1@6.592,16.15 6.517,16.075 5.814,16.075 4.31,14.571 cr1.3@4.31,14.303
pa1: 
pa4: 
pa15: 
pb0: 
pb1: 
pb2: 
pb7: u1.4@16.2,31 u2.1@11.792,23.85 | length 9.8
  Top Layer w0.2: u2.1@11.792,23.85 11.792,24.839 12.4,25.446 12.4,28.539 13.711,29.85 14.645,29.85 15.77,30.975 16.175,30.975 u1.4@16.2,31
pc8: 
pc9: 
pc10: 
pd8: 
pd9: 
pe3: i2c1.1@5.28,28.28 u2.1@6.592,21.65 | length 9.5
  Top Layer w0.2: v1(3.8,27.4) 3.8,27.184 3.58,26.964 3.58,24.587 5.135,23.031 5.135,22.14 5.55,21.725 5.9,21.725 6.517,21.725 u2.1@6.592,21.65
  Bottom Layer w0.2: v1(3.8,27.4) 3.95,27.4 4.83,28.28 i2c1.1@5.28,28.28
pe4: spi4.1@5.28,28.28 u2.1@6.592,21.15 | length 11.1
  Top Layer w0.2: spi4.1@5.28,28.28 3.58,28.28 3.05,27.75 3.05,24.622 4.785,22.886 4.785,21.995 5.555,21.225 5.9,21.225 6.517,21.225 u2.1@6.592,21.15
pwrled: pwr.1@3.259,21.976 r2.1@1.563,21.976 | length 8.3
  Top Layer w0.2: r2.1@1.563,21.976 1.563,22.876 1.764,23.076 2.38,23.076 2.58,23.276 2.58,24.749 2.1,25.229 v1(2.1,25.4)
  Bottom Layer w0.2: v1(2.1,25.4) 2.1,25.269 2.6,24.769 2.6,22.635 2.759,22.476 2.809,22.476 3.259,22.026 pwr.1@3.259,21.976
qmc_c1: c21.1@20.064,24.863 u6.1@22.68,24.43 | length 2.8
  Bottom Layer w0.2: c21.1@20.064,24.863 20.498,24.43 u6.1@22.68,24.43
qmc_setc: c22.1@17.86,25.937 u6.1@22.68,25.43 | length 6.3
  Bottom Layer w0.2: c22.1@17.86,25.937 17.91,25.937 18.546,26.572 18.546,26.6 19.396,27.45 20.711,27.45 22.62,25.541 22.62,25.455 22.645,25.43 u6.1@22.68,25.43
qmc_setp: c22.1@17.86,24.237 u6.1@23.2,23.41 | length 5.7
  Bottom Layer w0.2: c22.1@17.86,24.237 18.693,24.237 19.224,23.705 22.095,23.705 22.39,23.41 u6.1@23.2,23.41
res12k: r10.1@25.2,34.569 u1.4@21.1,33 | length 4.8
  Top Layer w0.2: u1.4@21.1,33 21.984,33 22.284,33.3 v1(22.5,33.3)
  Bottom Layer w0.2: v1(22.5,33.3) 23.931,33.3 24.7,34.069 24.75,34.069 25.2,34.519 r10.1@25.2,34.569
rx1: 
rx2: pad.1@14.62,37.8 u2.1@14.792,23.85 | length 20.5
  Top Layer w0.2: v1(10.9,35.9) 10.9,34.9 9.386,33.386 9.386,30.042 10.127,29.3 10.631,29.3 11.636,28.295 v1(11.636,28.164) ; v1(13.858,27.358) 13.858,27.342 14.792,26.408 u2.1@14.792,23.85
  Bottom Layer w0.2: v1(10.9,35.9) 11.017,35.9 11.417,36.3 13.12,36.3 pad.1@14.62,37.8 ; v1(11.636,28.164) 12.442,27.358 v1(13.858,27.358)
rx3: u2.1@18.792,8.45 uart.1@12.7,5.35 | length 14.5
  Top Layer w0.2: v1(16,5.4) 16.975,5.4 18.792,7.217 u2.1@18.792,8.45
  Bottom Layer w0.2: uart.1@12.7,5.8 12.7,2.917 12.817,2.8 16.583,2.8 16.7,2.917 16.7,4.7 v1(16,5.4)
rx4: pad.1@40.6,22.46 u2.1@17.792,23.85 | length 35.9
  Top Layer w0.2: u2.1@17.8,23.409 17.8,26.9 19.05,28.15 23.15,28.15 24.586,26.714 27.98,26.714 28.097,26.832 28.097,29.678 29.169,30.75 34.511,30.75 38.8,26.461 38.8,24.743 40.6,22.943 pad.1@40.6,22.46 ; pad.1@40.067,22.793 pad.1@40.4,22.46
rx5: u2.1@16.792,23.85 uart5.1@13.7,5.35 | length 25.5
  Top Layer w0.2: v1(12.1,10.3) 12.1,11.6 12.35,11.85 13.511,11.85 13.95,12.289 13.95,12.378 14.067,12.495 17.395,12.495 18.8,13.9 18.8,14.639 16.792,16.647 u2.1@16.792,23.85 ; v1(12.3,7.1) 12.4,7.1 13.7,5.8 uart5.1@13.7,5.35
  Bottom Layer w0.2: v1(12.1,10.3) 12.2,10.2 12.2,7.2 v1(12.3,7.1)
sck: u2.1@13.792,23.85 u7.1@22.05,20.95 u8.1@36.23,21.2 | length 56.5
  Top Layer w0.2: u2.1@13.792,23.85 13.792,22.611 14,22.403 14,20.9 v1(13.9,20.8)
  Bottom Layer w0.2: u7.1@22.05,20.95 22.05,22.25 21.645,22.655 18.894,22.655 17.039,20.8 v1(13.9,20.8) 13.9,18.555 15.161,17.294 16.597,17.294 16.714,17.177 16.714,14.425 17.689,13.45 23.65,13.45 25.15,14.95 25.15,18.145 24.05,19.245 24.05,22.183 24.167,22.3 26.466,22.3 26.73,22.037 29.029,22.037 29.647,22.655 32.559,22.655 33.954,24.05 35.611,24.05 36.23,23.431 u8.1@36.23,21.2 ; u8.1@36.23,21.2 36.23,20.35 u8.1@36.23,21.2
sck2: u1.4@16.2,33.5 u2.1@16.292,23.85 | length 12.3
  Top Layer w0.2: v1(14.5,33.2) 14.653,33.353 15.278,33.353 15.425,33.5 u1.4@16.2,33.5 ; v1(15.9,28) 15.916,28 16.474,27.443 16.485,27.443 16.65,27.277 16.65,25.15 16.367,24.867 16.367,23.925 u2.1@16.292,23.85
  Bottom Layer w0.2: v1(14.5,33.2) 16,31.7 16,28.1 v1(15.9,28)
sck4: spi4.1@5.28,27.28 u2.1@6.592,22.15 | length 7.5
  Top Layer w0.2: spi4.1@5.28,27.28 5.08,27.08 4.58,27.08 3.93,26.43 3.93,24.731 5.6,23.061 5.6,22.5 5.875,22.225 6.517,22.225 u2.1@6.592,22.15
scl: i2c1.1@5.28,27.28 r1.1@8.536,28.663 u2.1@10.792,23.85 u5.1@10.49,16.2 u6.1@25.22,25.43 | length 39.4
  Top Layer w0.2: r1.1@8.536,28.663 8.086,28.213 7.336,28.213 7,27.878 v1(7,27.8) 9.175,27.8 10.717,26.258 10.717,24.542 10.717,23.925 u2.1@10.792,23.85 ; u2.1@10.8,23.686 10.8,22.7 v1(11.6,21.9)
  Bottom Layer w0.2: i2c1.1@5.28,27.28 5.442,27.442 6.192,27.442 6.409,27.659 6.859,27.659 v1(7,27.8) ; u5.1@10.49,16.2 10.505,16.215 10.505,18.015 10.75,18.26 10.75,21.05 v1(11.6,21.9) 13.096,23.396 14.683,23.396 14.8,23.513 14.8,26.095 15.355,26.65 16.06,26.65 16.847,27.437 17.594,27.437 18.657,28.5 24.366,28.5 25.22,27.646 u6.1@25.22,25.43
sda: i2c1.1@5.28,26.28 r7.1@8.564,28.663 u2.1@10.292,23.85 u5.1@11.14,16.2 u6.1@24.7,25.95 | length 39.2
  Top Layer w0.2: v1(7,26.6) 7.05,26.65 7.989,26.65 8.289,26.95 9.53,26.95 10.292,26.188 u2.1@10.292,23.85 ; u2.1@10.3,23.791 10.3,21.9 v1(11.5,20.7)
  Bottom Layer w0.2: i2c1.1@5.28,26.28 5.48,26.48 6.88,26.48 7.836,27.436 7.836,28.213 8.114,28.213 r7.1@8.564,28.663 ; u5.1@11.14,16.2 11.115,16.225 11.115,20.099 11.5,20.484 v1(11.5,20.7) 12.3,21.5 12.3,21.539 12.35,21.589 12.35,22.155 13.241,23.046 15.033,23.046 15.15,23.163 15.15,25.95 15.5,26.3 16.205,26.3 16.992,27.087 17.739,27.087 18.802,28.15 24.104,28.15 24.7,27.554 u6.1@24.7,25.95
sence: r3.1@29.679,15.004 r4.1@29.7,12.9 u4.9@31.54,14.65
tx1: 
tx2: pad.1@12.08,37.8 u2.1@15.292,23.85 | length 19.5
  Top Layer w0.2: pad.1@12.08,36.941 pad.1@12.08,37.2 ; pad.1@12.08,37.8 12.25,37.63 12.25,35.35 9.736,32.836 9.736,30.187 10.272,29.65 11.734,29.65 11.984,29.4 v1(12.2,29.4) ; v1(14.8,28.4) 14.8,26.895 15.142,26.552 15.142,25.058 15.292,24.908 u2.1@15.292,23.85
  Bottom Layer w0.2: v1(12.2,29.4) 13.2,28.4 v1(14.8,28.4)
tx3: u2.1@18.292,8.45 uart.1@11.7,5.35 | length 8.7
  Top Layer w0.2: v1(17.4,7) 17.546,7 18.217,7.671 18.217,8.375 u2.1@18.292,8.45
  Bottom Layer w0.2: uart.1@11.7,5.35 11.9,5.55 11.9,6.183 12.067,6.35 16.777,6.35 17.4,6.973 v1(17.4,7)
tx4: pad.1@40.6,25 u2.1@17.292,23.85 | length 33.5
  Top Layer w0.2: u2.1@17.292,23.85 17.367,23.925 17.367,24.542 17.367,27.028 18.839,28.5 23.295,28.5 24.731,27.064 27.63,27.064 27.747,27.182 27.747,29.823 29.025,31.1 34.656,31.1 37.206,28.55 40.6,25.156 pad.1@40.6,25
tx5_1: r9.1@15.428,9.862 u2.1@18.292,23.85 | length 20.5
  Top Layer w0.2: v1(13.1,11) 13.195,11 14.34,12.145 17.54,12.145 19.15,13.755 19.15,16.59 18.6,17.14 18.6,21.956 18.292,22.263 18.292,23.85 u2.1@18.359,23.916
  Bottom Layer w0.2: v1(13.1,11) 13.253,10.847 13.653,10.847 14.638,9.862 r9.1@15.428,9.862
tx5_2: r9.1@15.428,8.162 uart5.1@14.7,5.35 | length 4.3
  Top Layer w0.2: v1(13.7,7.1) 14.538,6.262 14.538,5.512 uart5.1@14.7,5.35
  Bottom Layer w0.2: v1(13.7,7.1) 14.312,7.712 14.978,7.712 r9.1@15.428,8.162
v2: 
v5: c7.1@33.137,20.269 c8.10@27.1,18 l3.7@36.15,18.11 pad.1@17.16,37.8 r3.1@29.679,16.704 u3.1@33.7,22.3 | length 39.5
  Top Layer w0.2: 25.8,18.055 25.8,16.817 25.917,16.7 29.675,16.7 r3.1@29.679,16.704
  Top Layer w1: 33.6,18.9 33.187,19.313 33.187,20.219 33.137,20.269 33.137,20.319 33.393,20.576 33.6,20.783 33.6,22.2 u3.1@33.7,22.3
  Mid-Layer 2 w0.2: 17.95,29.375 17.95,29.411
  Mid-Layer 2 w0.6: pad.1@17.16,37.8 16.86,37.8 16.6,37.54 16.6,30.401 17.051,29.95 17.693,29.95 18.109,29.534 20.748,26.896 20.748,24.252 23.95,21.05 23.95,20.707 25.307,19.35 26.15,19.35 26.536,18.964 31.589,18.964 v1(32.434,18.119)
v_bat: r5.1@27.449,1.536 r6.1@29.568,1.536 u2.1@11.292,8.45 | length 25.5
  Top Layer w0.2: u2.1@11.292,8.45 11.367,8.375 11.367,7.758 ; 11.367,7.758 11.367,3.096 11.664,2.8 16.554,2.8 16.85,2.504 16.85,1.653 17.303,1.2 24.581,1.2 25.095,0.686 26.638,0.686 26.988,1.036 26.999,1.036 27.449,1.486 27.449,1.536 r6.1@29.568,1.536
v_ext: 
vbat: 
vcap1: c32.1@26.039,18.364 u2.1@21.992,21.15 | length 6.2
  Top Layer w0.2: u2.1@21.992,21.15 22.017,21.175 24.875,21.175 v1(24.9,21.2)
  Bottom Layer w0.2: v1(24.9,21.2) 24.9,19.553 26.039,18.414 c32.1@26.039,18.364
vcap2: c26.1@16.263,12.036 u2.1@19.292,8.45 | length 5.6
  Top Layer w0.2: v1(17.2,10.2) 17.2,9.984 17.556,9.627 17.556,9.566 17.748,9.375 19.071,9.375 19.217,9.229 19.217,9.142 ; 19.217,9.142 19.217,9.025 19.292,8.95 u2.1@19.292,8.45
  Bottom Layer w0.2: c26.1@16.263,12.036 16.263,11.986 17.2,11.049 v1(17.2,10.2)
vcc: c3.1@4.436,9.963 c10.1@35.954,24.863 c12.1@7.263,21.936 c13.1@8.422,19.721 c14.1@6.536,15.867 c15.1@6.718,11.737 c17.1@9.837,11.991 c18.1@10.572,9.736 c19.1@12.564,34.763 c20.1@16.419,34.836 c23.1@18.069,17.963 c24.1@15.864,18.094 c25.1@15.864,14.263 c27.1@20.437,8.464 c28.1@25.237,32.364 c29.1@30.799,27.391 c30.1@28.036,23.537 c31.1@28.073,21.012 c33.1@24,16 i2c1.1@5.28,30.28 pad.1@21.24,2.56 pwr.1@1.559,21.976 r1.1@8.536,30.363 r7.1@8.564,30.363 spi4.1@5.28,30.28 u1.4@16.2,32.5 u1.4@16.9,29.3 u1.4@17.4,34.2 u1.4@18.9,34.2 u1.4@19.4,34.2 u1.4@20.4,34.2 u1.4@21.1,32 u1.4@21.1,32.5 u2.1@6.592,12.15 u2.1@6.592,12.65 u2.1@6.592,17.15 u2.1@6.592,19.65 u2.1@8.292,23.85 u2.1@8.792,8.45 u2.1@20.292,8.45 u2.1@21.992,22.15 u3.1@31.4,22.3 u5.1@11.14,14.75 u5.1@12.44,14.75 u6.1@23.2,25.95 u6.1@25.22,23.93 u6.1@25.22,24.93 u7.1@20.9,19.3 u7.1@22.55,19.15 u8.1@33.69,21.2 u8.1@34.96,21.2 uart.1@13.7,5.35 | length 133.5
  Top Layer w0.2: v1(3.5,30.4) v1@3.649,30.4 ; c3.1@4.436,9.963 4.686,9.713 8.3,9.713 ; spi4.1@5.28,30.28 5.16,30.4 v1@3.649,30.4 ; u2.1@6.592,17.15 6.667,17.075 7.625,17.075 8.3,16.4 v1(8.4,16.4) ; u2.1@6.592,19.65 6.667,19.725 7.371,19.725 8.217,20.571 8.217,20.652 v1(9.007,21.442) ; u2.1@6.667,12.225 6.592,12.15 6.617,12.175 8.075,12.175 v1@8.175,12.075 ; u2.1@6.667,12.575 6.592,12.65 7.634,12.65 8.084,12.2 v1(8.3,12.2) ; v1(7.2,24.2) 8.217,24.2 8.292,24.125 u2.1@8.292,23.85 ; v1@8.175,11.948 v1@8.175,12.075 ; r1.1@8.536,30.363 8.086,30.813 6.15,30.813 6.134,30.83 4.079,30.83 v1@3.649,30.4 ; u2.1@8.717,8.525 8.792,8.45 8.792,9.532 8.611,9.713 8.3,9.713 ; v1(14.3,31.7) 14.453,31.853 14.903,31.853 15.55,32.5 u1.4@16.2,32.5 ; u1.4@16.9,29.3 16.925,29.275 16.925,28.691 17.2,28.416 v1(17.2,28.2) ; u1.4@17.4,34.2 17.425,34.225 17.425,34.625 v1(18.2,35.4) 18.875,34.725 ; v1(18.7,11.4) 18.7,11.184 19.15,10.734 19.15,10.45 20.292,9.308 u2.1@20.292,8.45 ; u1.4@18.9,34.2 18.875,34.225 18.875,34.725 ; u1.4@19.4,34.2 19.4,34.425 19.1,34.725 18.875,34.725 ; u1.4@20.4,34.2 20.4,34.425 21.225,35.25 23.011,35.25 23.5,34.761 v1(23.5,32.5) 22,32.5 ; u1.4@21.1,32 21.125,32.025 21.525,32.025 22,32.5 ; u1.4@21.1,32.5 22,32.5 ; u2.1@21.992,22.15 22.067,22.225 23.575,22.225 23.684,22.334 25.838,22.334 26.2,21.972 26.2,21.717 26.6,21.316 v1(26.6,21.1) ; v1(35.3,23.3) 35.963,23.963 35.963,24.854 c10.1@35.954,24.863 ; v1@8.175,12.075 v1(8.3,12.2) ; 8.3,9.713 v1(8.3,12.2)
  Top Layer w1: u3.1@31.4,22.3 v1(31.4,24.2)
  Bottom Layer w0.2: pwr.1@1.559,21.976 1.559,21.926 2.399,21.086 6.452,21.086 6.802,21.436 6.813,21.436 7.263,21.886 7.263,21.936 7.2,21.999 v1(7.2,24.2) ; v1(3.5,30.4) v1@3.649,30.4 ; i2c1.1@5.28,30.28 5.16,30.4 v1@3.649,30.4 ; c14.1@6.536,15.867 6.986,16.317 6.986,16.387 8.387,16.387 v1(8.4,16.4) ; c15.1@6.718,11.737 7.168,12.187 7.487,12.187 7.5,12.2 v1(8.3,12.2) ; c13.1@8.422,19.721 8.422,20.856 v1(9.007,21.442) ; r7.1@8.564,30.363 8.114,30.813 6.15,30.813 6.134,30.83 4.078,30.83 v1@3.649,30.4 ; c18.1@10.572,9.736 10.572,9.786 9.314,11.043 9.281,11.043 8.3,12.024 v1(8.3,12.2) ; u5.1@11.14,14.75 11.14,14.69 11.155,14.675 11.155,13.601 10.278,12.724 10.278,12.432 9.837,11.991 9.627,12.2 v1(8.3,12.2) ; u5.1@12.44,14.75 13.55,14.75 v1(13.6,14.8) 13.816,14.8 14.016,14.6 15.528,14.6 c25.1@15.864,14.263 ; c19.1@12.564,34.763 12.614,34.763 13.587,35.736 16.302,35.736 16.419,35.618 16.419,34.836 17.633,34.836 18.198,35.4 v1(18.2,35.4) ; v1(13.7,3.9) uart.1@13.7,5.35 ; c24.1@15.864,18.094 16.234,18.463 17.519,18.463 18.019,17.963 18.069,17.963 18.519,17.513 19.069,17.513 19.382,17.2 v1(20.6,17.2) 20.6,17.416 20.9,17.716 u7.1@20.9,19.3 ; v1(18.7,11.4) 20.287,9.813 20.287,8.614 c27.1@20.437,8.464 ; v1(20.6,15.3) 20.75,15.15 23.189,15.15 23.539,15.5 23.55,15.5 24,15.95 24,16.8 22.55,18.25 u7.1@22.55,19.15 ; v1(22.4,27) 22.4,26.785 23.2,25.985 u6.1@23.2,25.95 ; v1(23.5,32.5) 25.101,32.5 c28.1@25.237,32.364 ; u6.1@25.22,23.93 25.914,23.93 26.184,24.2 v1(26.4,24.2) ; u6.1@25.22,24.93 25.754,24.93 26.4,24.284 v1(26.4,24.2) ; v1(26.6,21.1) 27.985,21.1 c31.1@28.073,21.012 ; c30.1@28.036,23.537 27.586,23.987 26.83,23.987 26.616,24.2 v1(26.4,24.2) ; c29.1@30.799,27.391 30.799,25.901 31.247,25.453 31.247,24.353 v1(31.4,24.2) ; u8.1@33.69,21.2 34.96,21.2 34.96,22.75 35.3,23.09 v1(35.3,23.3)
vin: c9.1@34.237,7.584 esc.1@26.38,5.48 r5.1@25.749,1.536 u4.9@34.08,9.55 | length 13.4
  Top Layer w0.2: r5.1@25.749,1.536 25.9,1.686 v1(25.9,3.2)
  Mid-Layer 2 w1: v1(25.9,3.2) 25.9,3.826 27.774,5.7 33.5,5.7 v1(33.6,5.8)
  Bottom Layer w0.2: v1(25.9,3.2) 25.9,3.331 26.4,3.831 26.4,5.46 esc.1@26.38,5.48
xtal_in: c5.1@25.263,34.764 cr2.3@25.1,32.6 u1.4@21.1,31.5 | length 6.9
  Top Layer w0.2: u1.4@21.1,31.5 21.844,31.5 22.044,31.7 24.143,31.7 24.443,32 24.6,32 24.813,32.213 cr2.3@24.813,32.6 ; cr2.3@24.787,32.6 25.1,32.6 25.1,34.601 c5.1@25.263,34.764
xtal_out: c6.1@26.863,28.264 cr2.3@26.8,30.4 u1.4@21.1,31 | length 8.7
  Top Layer w0.2: u1.4@21.1,31 21.839,31 22.189,31.35 25.95,31.35 26.8,30.5 26.8,30.4 26.487,30.087 26.487,28.641 c6.1@26.863,28.264
pads on no net: ant1.6@34.45,38.52 esc.1@32.38,5.48 esc.5 i2c1.1@5.28,25.28 i2c1.5 spi4.5 u1.4@17.4,29.3 u1.4@17.9,29.3 u1.4@17.9,34.2 u1.4@18.4,29.3 u1.4@18.4,34.2 u1.4@18.9,29.3 u1.4@19.4,29.3 u1.4@19.9,29.3 u1.4@20.4,29.3 u2.1@6.592,10.15 u2.1@6.592,10.65 u2.1@6.592,11.15 u2.1@6.592,11.65 u2.1@6.592,14.65 u2.1@6.592,15.15 u2.1@6.592,18.15 u2.1@6.592,18.65 u2.1@6.592,19.15 u2.1@9.292,8.45 u2.1@9.792,8.45 u2.1@10.292,8.45 u2.1@10.792,8.45 u2.1@12.292,8.45 u2.1@12.792,8.45 u2.1@13.292,8.45 u2.1@13.792,8.45 u2.1@14.292,8.45 u2.1@14.792,8.45 u2.1@15.292,8.45 u2.1@15.792,8.45 u2.1@16.292,8.45 u2.1@16.792,8.45 u2.1@17.292,8.45 u2.1@17.792,8.45 u2.1@19.792,23.85 u2.1@21.992,11.15 u2.1@21.992,11.65 u2.1@21.992,12.15 u2.1@21.992,12.65 u2.1@21.992,13.15 u2.1@21.992,13.65 u2.1@21.992,14.15 u2.1@21.992,14.65 u2.1@21.992,15.15 u2.1@21.992,15.65 u2.1@21.992,16.15 u2.1@21.992,16.65 u2.1@21.992,17.15 u2.1@21.992,17.65 u3.1@31.4,28.5 u4.9@31.54,9.55 u4.9@32.81,14.65 u4.9@34.08,14.65 u5.1@10.49,14.75 u5.1@11.79,16.2 u6.1@23.7,23.41 u6.1@23.7,25.95 u6.1@24.2,23.41 u6.1@24.7,23.41 u6.1@25.22,24.43 u7.1@20.9,20.3 u7.1@23.2,19.3 u7.1@23.2,19.8 u7.1@23.2,20.3 uart5.5 uart.5

## Polygon pours and split planes (outlines as drawn)
v5 on Top Layer "V5_L01_P019" (solid, pour order 19): 36.55,19.2 25.7,19.2 25.7,17.1 28.7,17.1 28.7,17.5 30.6,17.5 30.6,17.1 36.55,17.11
gnd on Top Layer "GND_L01_P021" (solid, pour order 21): 38.6,13.5 31.8,13.5 31.8,11.75 28.1,11.75 28.1,16.2 25.8,16.2 25.8,13.1 25.8,9.9 28.8,9.9 28.8,8.4 28.8,6.7 30.5,6.7 33.3,6.7 33.3,10.7 32.4,10.7 32.4,8.4 30.7,8.4 30.7,10.7 35.1,10.7 35.1,11.7 38.6,11.7
sence on Top Layer "SENCE_L01_P023" (solid, pour order 23): 32,15.8 30.4,15.8 29,15.8 29,12.2 30.5,12.2 30.5,13.9 32,13.9
vin on Top Layer "VIN_L01_P022" (solid, pour order 22): 33.6,10.3 33.6,6.4 33,6.4 33,5 34,5 34.787,5.9 34.787,10.3
loop on Top Layer "LOOP_L01_P020" (solid, pour order 20): 39.5,20.1 39.5,10.3 35.025,10.3 35.025,8.915 35.35,8.915 35.35,7.6 40.9,7.6 40.9,20.1
dcdc_boot on Top Layer "DCDC_BOOT_L01_P024" (solid, pour order 24): 34.9,13.9 39.2,13.9 39.2,15.5 34.9,15.5
gnd on Mid-Layer 1 "GND_L02_P003" (solid, pour order 3): 24.3,37 24.3,40.1 9.5,40.1 9.5,32.5 0,32.5 0,7.3 0,7.5 9.6,7.5 9.6,0 34.3,0 34.3,7.7 43,7.7 43,20.9 43,32.17 34.4,32.17 34.4,37
vcc on Mid-Layer 2 "VCC_L03_P004" (solid, pour order 4): 0,7.5 9.6,7.5 9.6,0 34.3,0 34.3,7.7 43,7.7 43,20.9 43,32.17 34.4,32.17 34.4,36.4 21.3,36.4 21.3,40.1 9.5,40.1 9.5,32.5 0,32.5

## Keep-outs
Mid-Layer 2:
  lines w0.45: 19.9,33.9 19.9,34.8 19.904,34.904 21.573,36.573

## Silkscreen, mask and mechanical layers (free items; w line width, h text height)
Top Overlay:
  circle w0.15: c21.6,34.8 r0.354
  text "bt" at 12.11,25.322 h1
  text "rst" at 0.2,9.6 h1
Bottom Overlay:
  text "g" at 20,39.333 h1
  text "tx" at 12.6,39 h1
  text "rx" at 15,39 h1
  text "5v" at 17.9,39 h1
  text "erx" at 39.4,31 h1 r90
  text "etx" at 39.5,28.7 h1 r90
  text "tx" at 39.5,25.4 h1 r90
  text "rx" at 39.5,22.9 h1 r90
  text "dio" at 19.8,6.3 h1
  text "clk" at 21.9,6.3 h1
  text "gnd" at 19.6,0.633 h1
  text "vcc" at 22.4,0.6 h1
Mechanical 1:
  lines w0.1: 54,3 73.3,3 73.3,21.8 54,21.8 54,3